# EAGLE board Transmissometer_RX_Boardv1 (EAGLE 6.4)
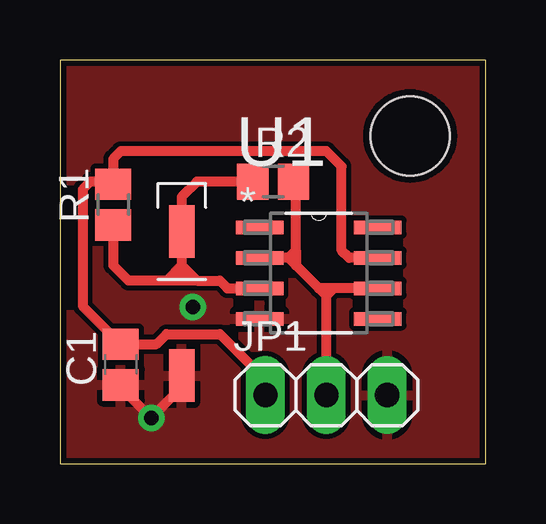
[diagram p0: board, top side]
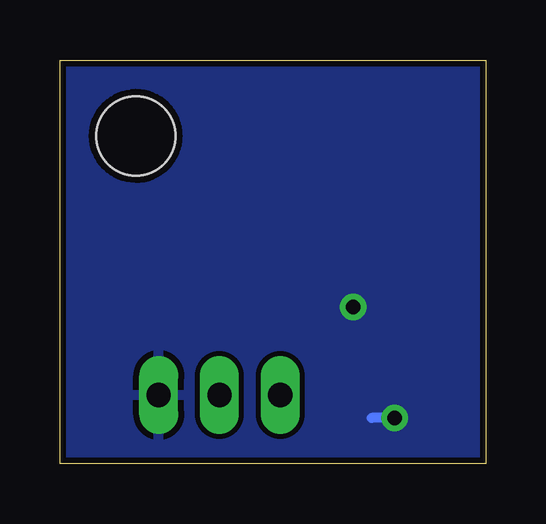
[diagram p1: board, bottom side, seen from below]

Size 17.77 x 16.82 mm. Coordinates in mm from the lower left corner, seen from the top.
Outline: 0,0 17.77,0 17.77,16.82 0,16.82 0,0
Copper layers (1*16): Top 0.035mm / dielectric 1.5mm / Bottom 0.035mm
Design rules "default": minimum track width 8mil, minimum drill 20mil, track to track 8mil, track to pad 8mil, pad to pad 8mil, via to via 8mil, smd to smd 8mil, copper to edge 10mil, drill to drill 8mil, minimum pad ring 12mil, minimum via ring 10mil, stop-mask expansion 4mil, vias tented up to drill 25mil, thermal gap 10mil

## Footprints (pad centres in the part's own frame; a part is rotated, then mirrored left to right if it is on the bottom)
C0805 = smd 1.3 x 1.5: 1 -0.85,0; 2 0.85,0
1X03 = drill 1.016 long: 1 -2.54,0; 2 0,0; 3 2.54,0
R0805 = smd 1.3 x 1.5: 1 -0.85,0; 2 0.85,0
SOIC127P600X175-8N = smd 1.981 x 0.559: 1 -2.464,1.905; 2 -2.464,0.635; 3 -2.464,-0.635; 4 -2.464,-1.905; 5 2.464,-1.905; 6 2.464,-0.635; 7 2.464,0.635; 8 2.464,1.905
TEMPT1020 = smd 2.184 x 1.067: P$1 3,0; P$2 -3,0
STAND-OFF = hole 3.302: 0,0

## Placement (x,y rotation side)
C1  0.1u  [C0805]  2.54,4.13 90 top
JP1  [1X03]  11.11,2.86 0 top
R1  1K  [R0805]  2.22,10.79 90 top
R2  NP  [R0805]  8.89,11.75 0 top
U1  AD8628ARZ-REEL7  [SOIC127P600X175-8N]  10.79,7.94 0 top
U$1  TEMPT1020  [TEMPT1020]  5.08,6.67 270 top
U$2  [STAND-OFF]  14.61,13.65 0 top

## Library data of the parts
C1 R1 R2 = resistor
JP1 = pinhead
U1 = ADI-Phase-2; MPN: AD8628ARZ-REEL7; OC_FARNELL: unknown; OC_NEWARK: 59K6999; PACKAGE: SOIC-8; SUPPLIER: Analog Devices
U$1 = Personal
U$2 = SparkFun-Electromechanical

## Nets
+5V: C1.2 JP1.1 R1.2 U1.7
GND: C1.1 JP1.3 U1.4 U$1.P$1
N$4: R1.1 R2.1 U1.3 U$1.P$2
OUT: JP1.2 R2.2 U1.2 U1.6

## Tracks (layer width: path | path; a pad name or v marks a point on that pad's centre or on a via)
+5V
  Top 0.406: JP1.1 8.57,3.49 6.67,5.4 4.45,5.4 4.03,4.98 C1.2 0.95,6.57 0.95,11.43 1.27,11.75 2.22,11.75 | U1.7 12.06,8.57 11.75,8.89 11.75,12.38 11.11,13.02 2.54,13.02 2.22,12.7 2.22,11.75 | R1.2 2.22,11.75
GND  (via drill 0.6)
  Top 0.406: C1.1 2.54,3.17 v3.81,1.91 5.08,3.17 U$1.P$1
  Bottom 0.406: v3.81,1.91 4.76,1.91
  other vias: 5.54,6.53
  pour Bottom: 0,0 0,16.83 17.78,16.83 17.78,0
  pour Top: 0,16.83 17.78,16.83 17.78,0 0,0
N$4
  Top 0.406: 5.71,7.62 5.08,7.62 | 5.08,7.62 4.45,7.62 | 4.45,7.62 2.86,7.62 2.22,8.26 R1.1 | 5.08,8.26 U$1.P$2 5.08,11.11 5.71,11.75 R2.1 | 5.08,8.26 5.08,7.62 | 5.08,8.26 4.45,7.62 | 5.08,8.26 5.71,7.62 | 5.71,7.62 6.67,7.62 6.99,7.3 U1.3
OUT
  Top 0.406: JP1.2 11.11,6.99 | 11.11,6.99 10.79,7.3 | 10.79,7.3 9.84,8.26 | 9.84,8.26 9.53,8.57 | 9.53,8.57 U1.2 | U1.6 11.43,7.3 | 11.43,7.3 11.11,6.99 | 11.43,7.3 10.79,7.3 | 9.53,8.57 9.84,8.89 | 9.84,8.89 9.84,11.75 R2.2 | 9.84,8.89 9.84,8.26

## Text on the board
tDocu: GND | OUT | +5V